# Altium PCB Плата верхняя версия 7 обычная.PcbDoc
Units mm, origin at the board's own origin, x right, y up, seen from the top; angles counter-clockwise.
Board outline 53 x 45 mm, 4 copper layers (Top Layer, Layer 1, Layer 2, Bottom Layer), stack 1.781 mm thick; 115 components, 169 nets, 808 pads, 224 vias.
Unrouted connection lines stored in the file: 286.
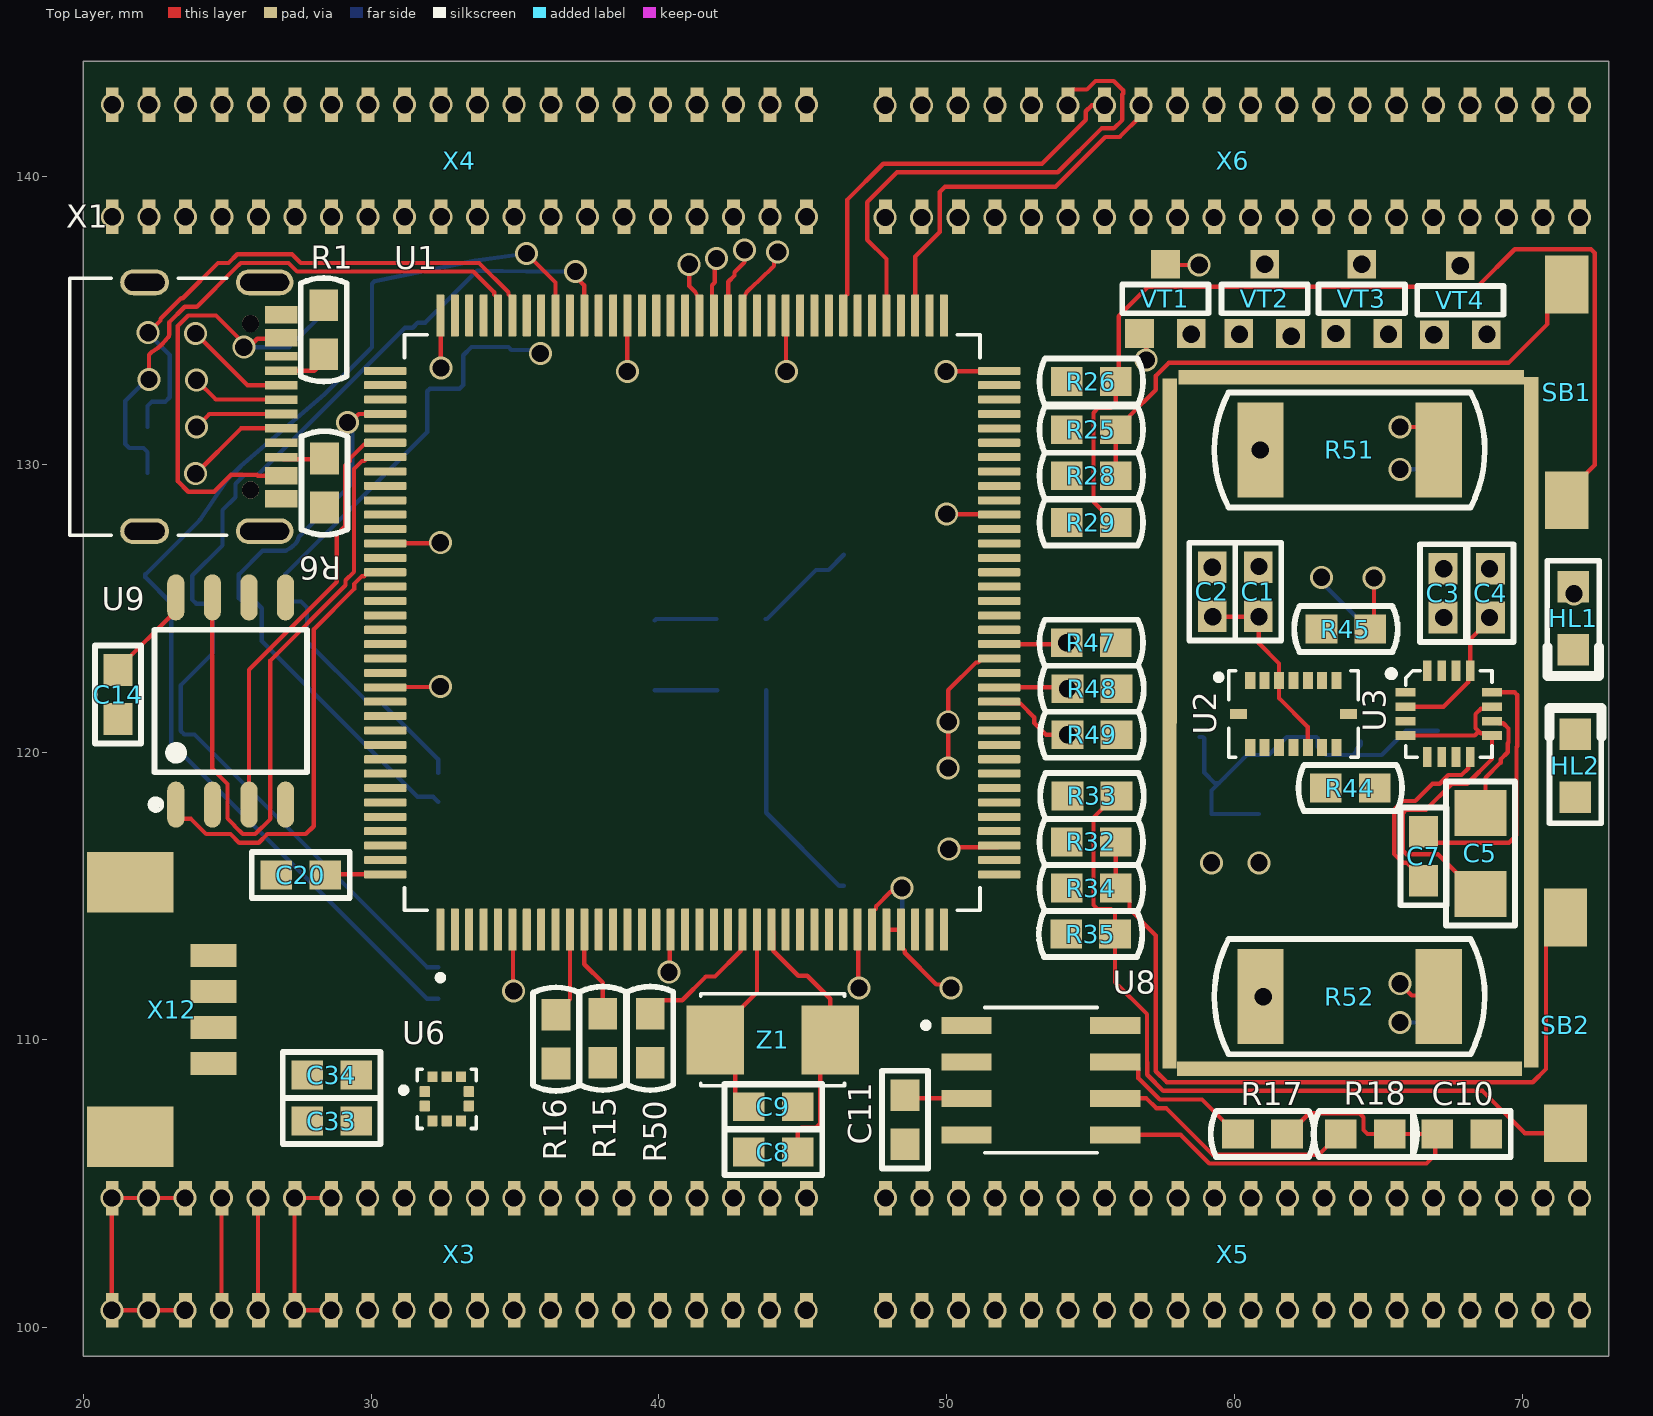
[diagram p0: Top Layer view]
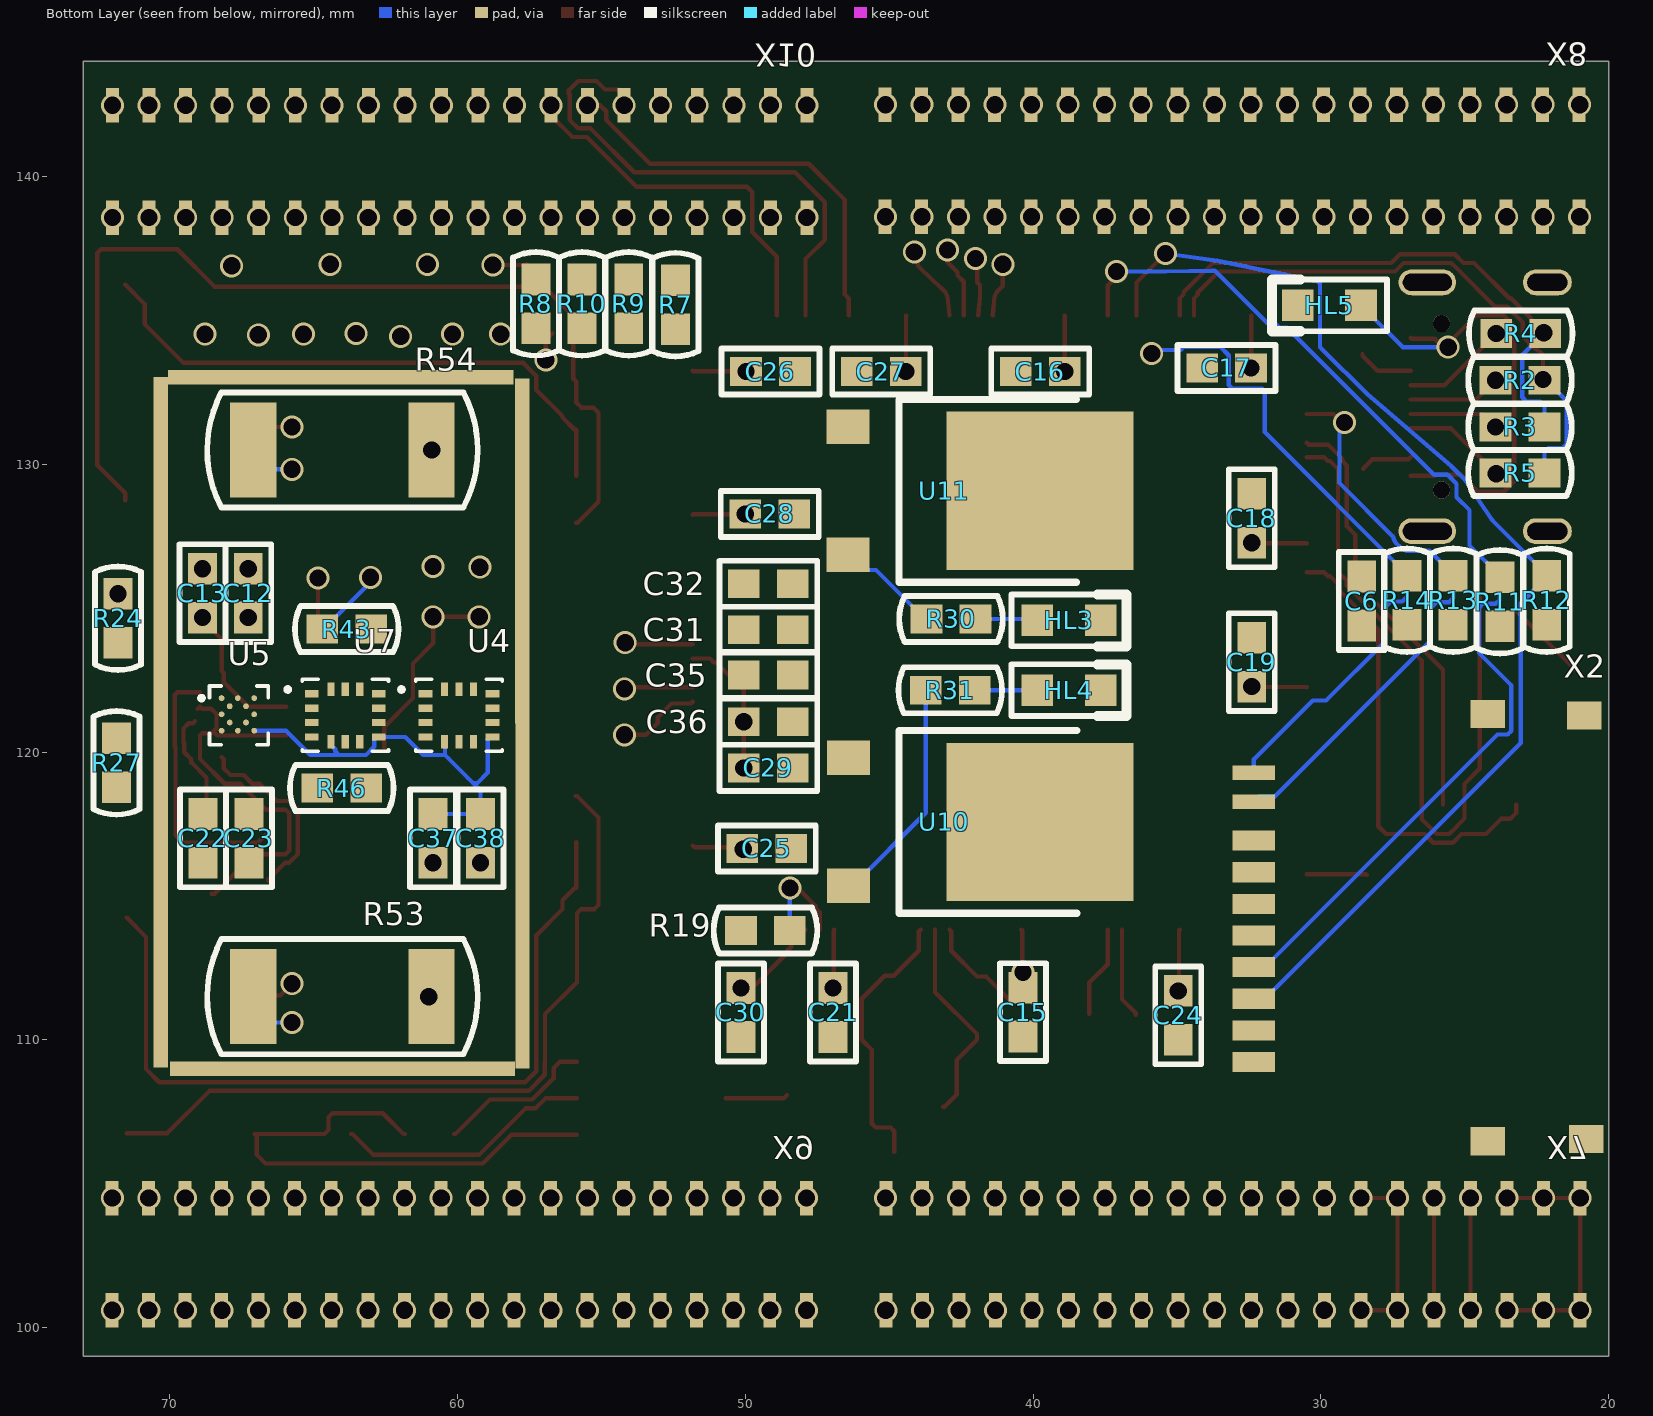
[diagram p1: Bottom Layer view, seen from below]
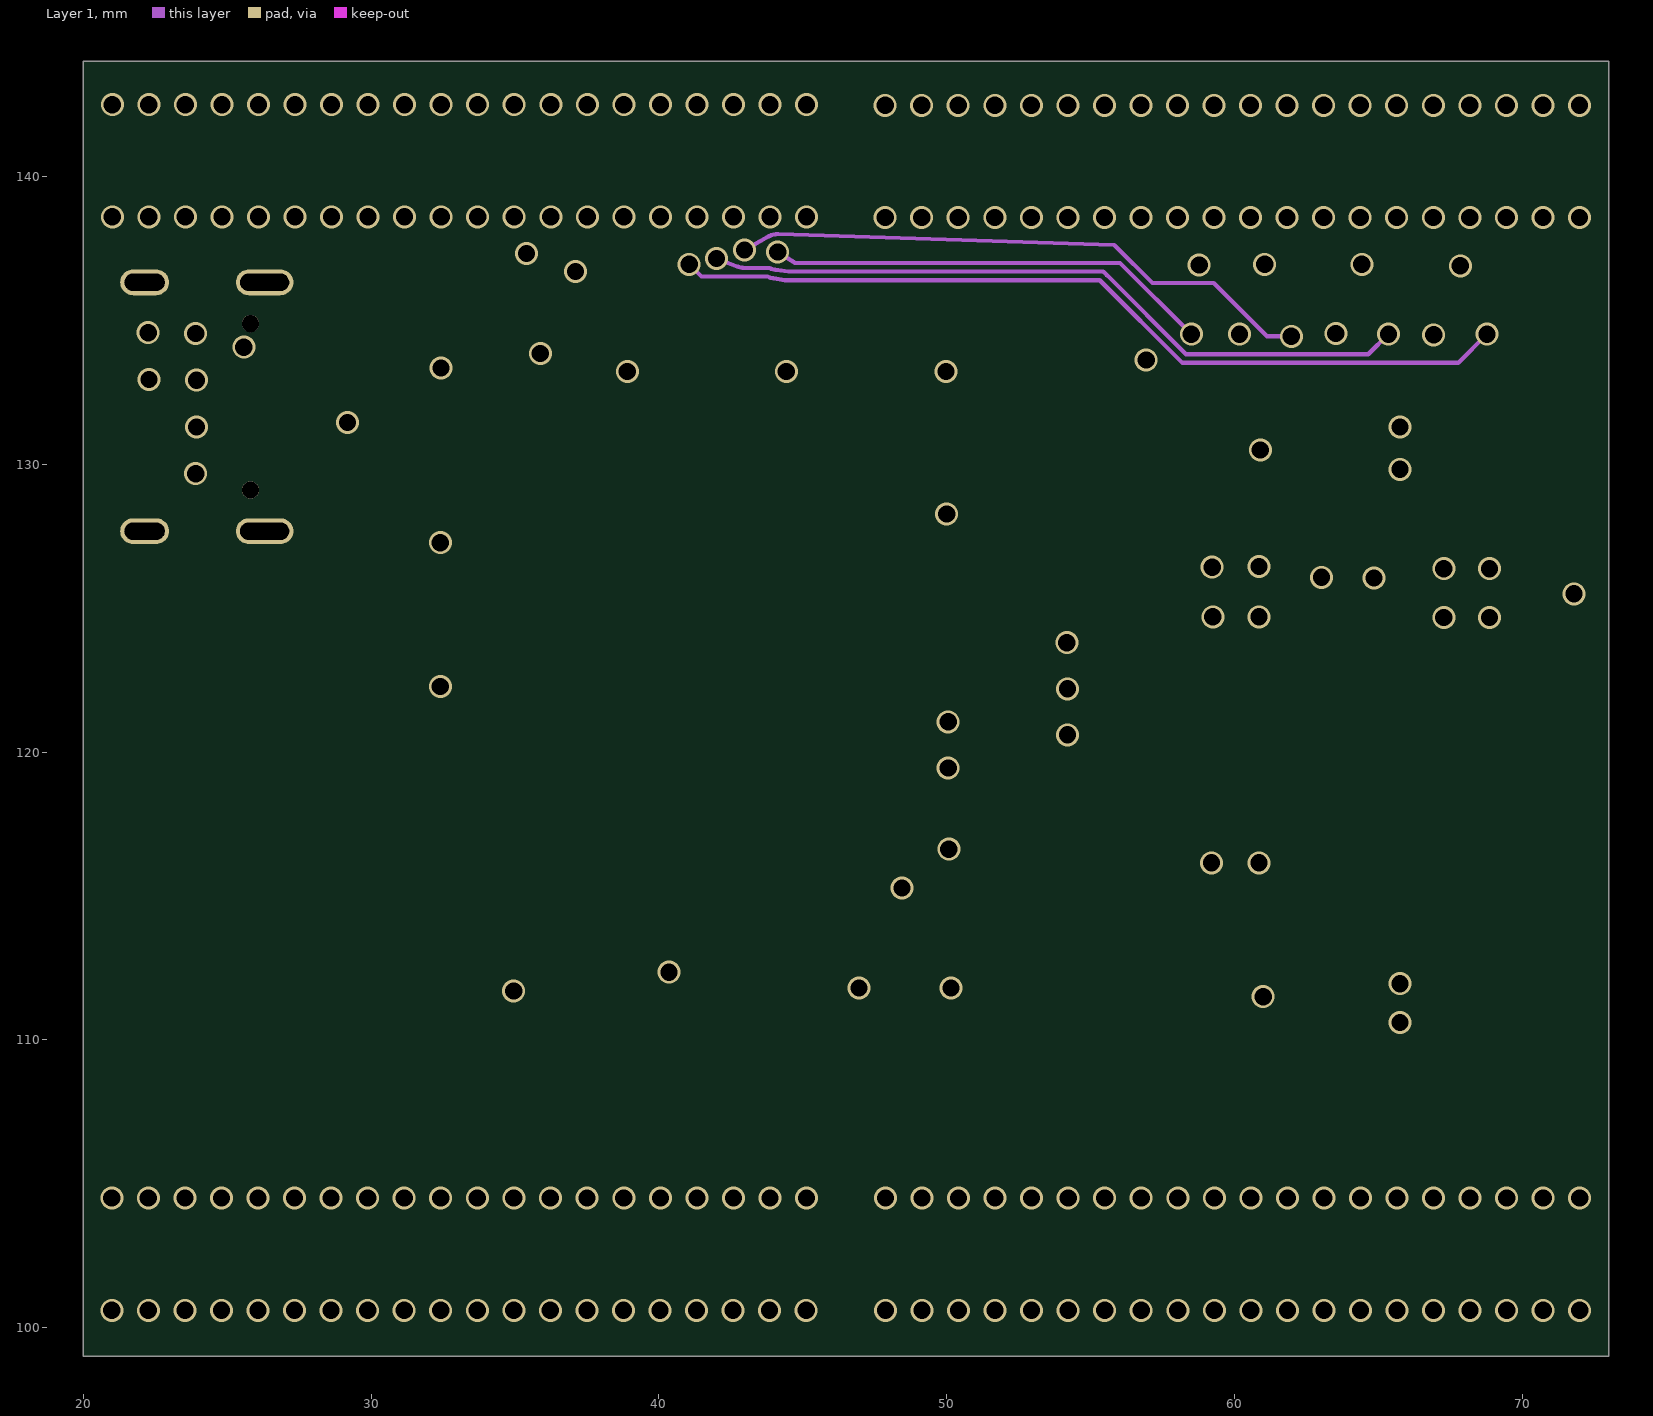
[diagram p2: Layer 1]
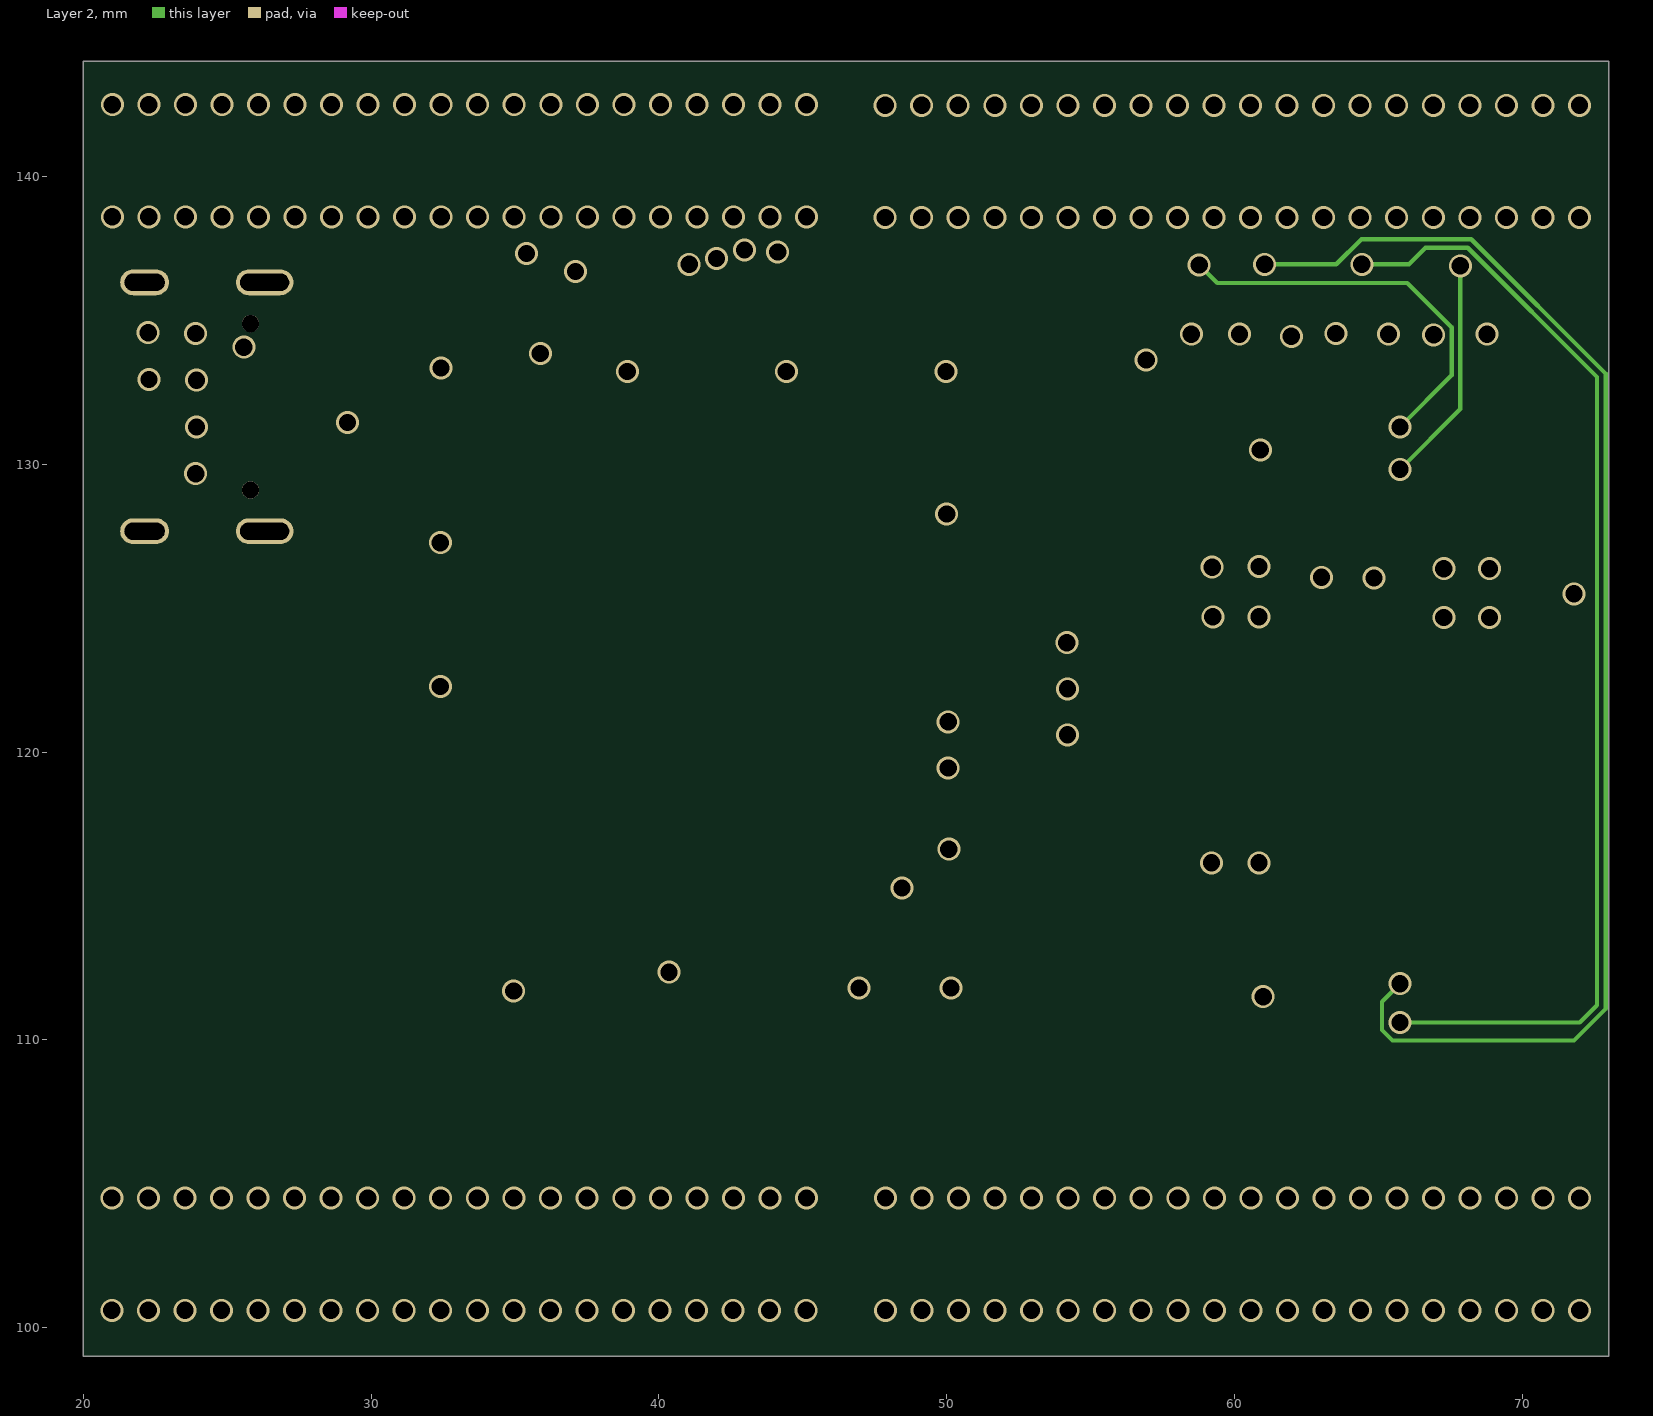
[diagram p3: Layer 2]
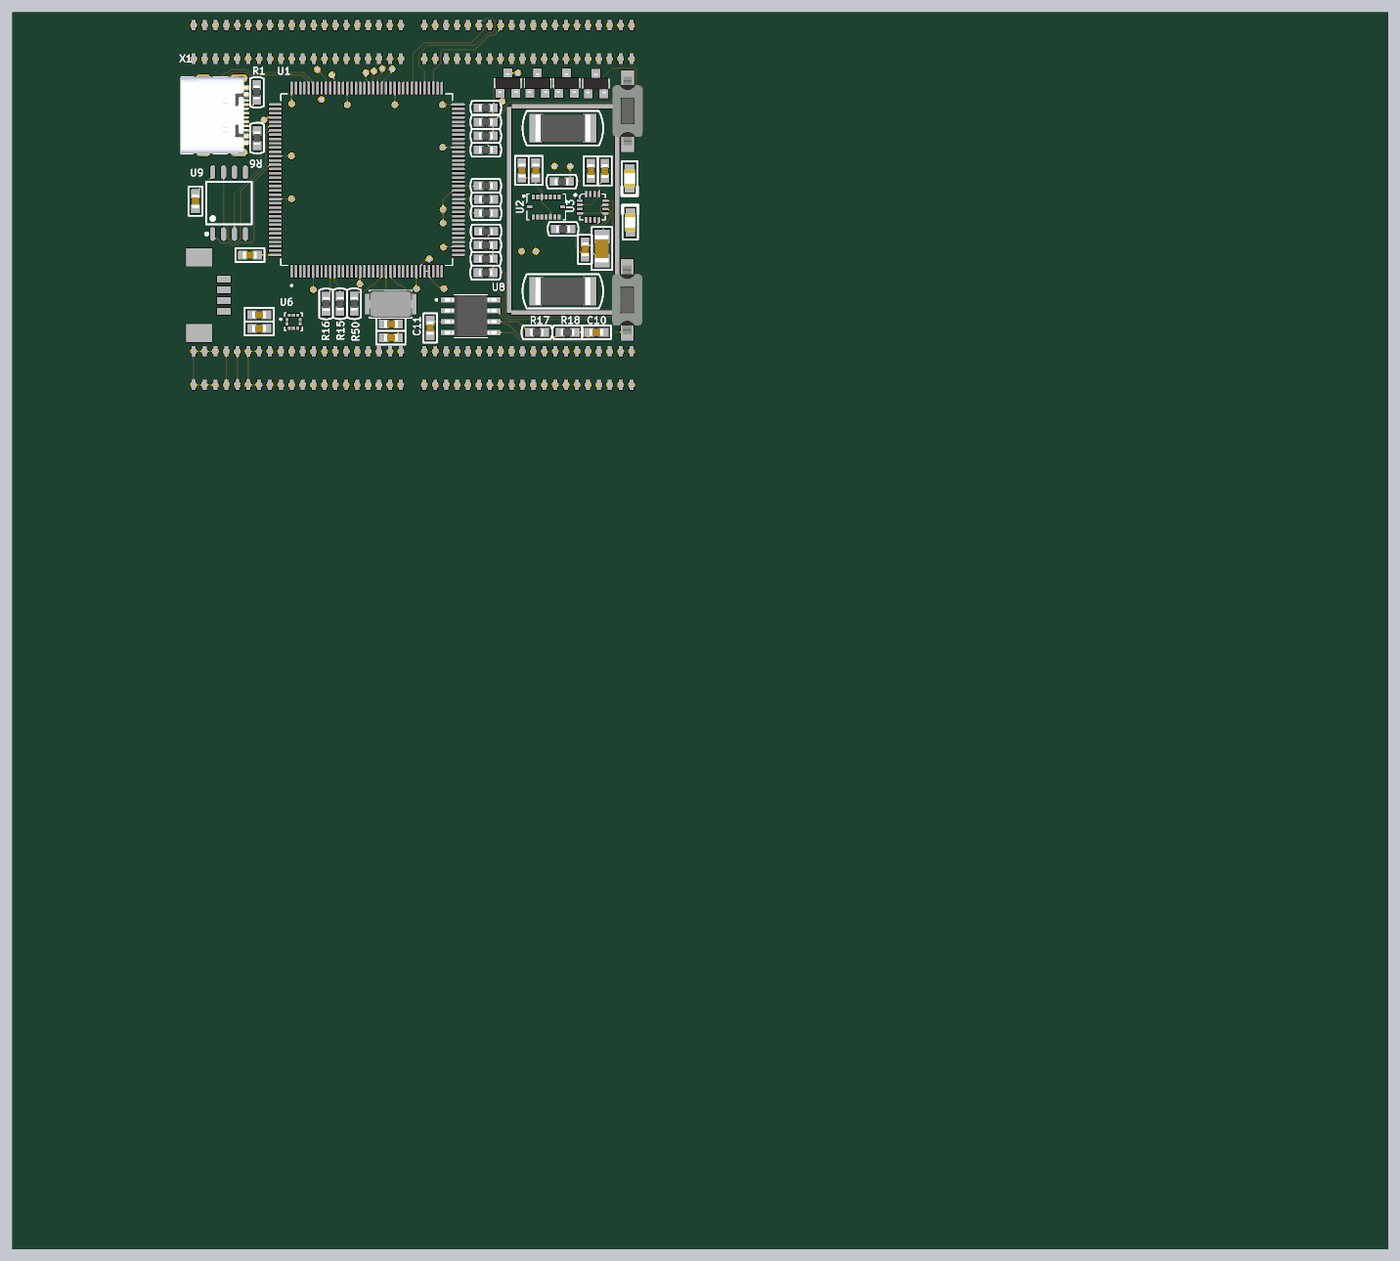
[diagram p4: 3D render of the assembled board from above, using the file's embedded part models]
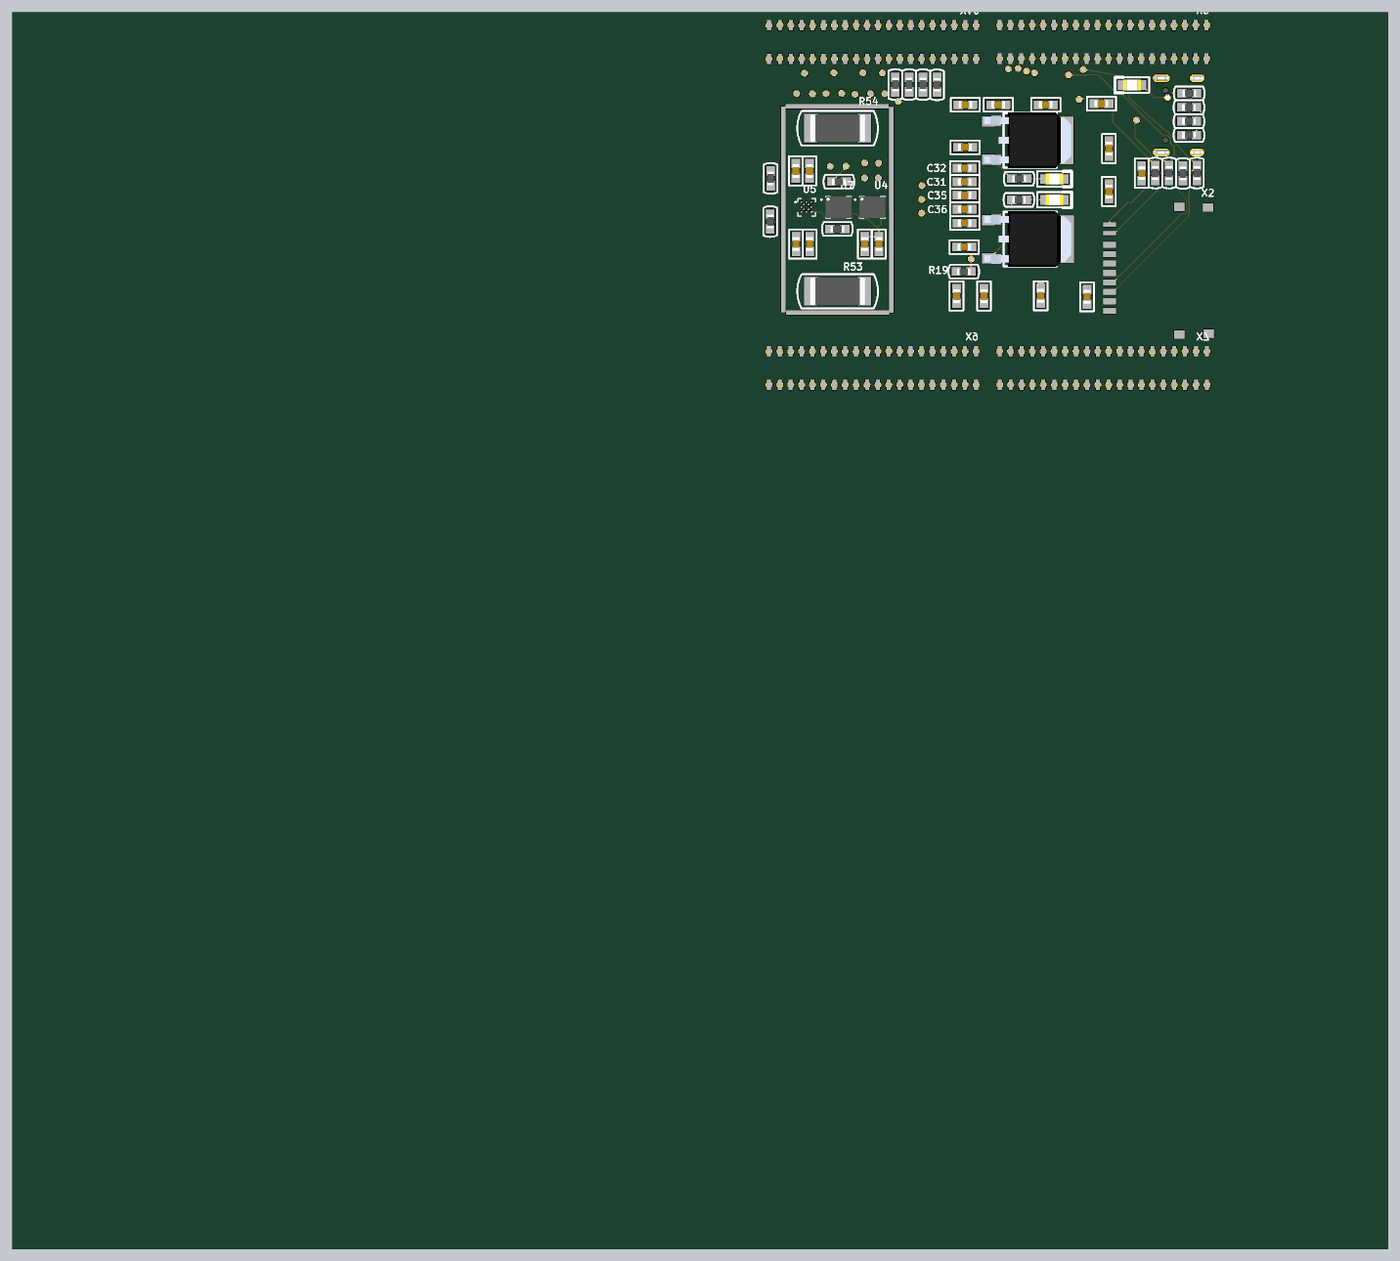
[diagram p5: 3D render of the assembled board from below, using the file's embedded part models]

## Layer stack, top to bottom
Top Solder: solder mask 0.01, Solder Resist, Dk 3.5
Top Layer: signal copper 0.035
Dielectric 2: prepreg 0.0711, PP-006, Dk 4.1
Layer 1: signal copper 0.035
Dielectric 1: core 1.499, Core-043, Dk 4.3
Layer 2: signal copper 0.035
Dielectric 3: prepreg 0.0711, PP-006, Dk 4.1
Bottom Layer: signal copper 0.035
Bottom Solder: solder mask 0.01, Solder Resist, Dk 3.5

## Board outline
20,99 20,144 73,144 73,99

## Design rules (kind name [scope] priority, off if disabled: settings)
Clearance [All] p1: gap=0.15 ignorepadtopadclearanceinfootprint=TRUE
PolygonConnect [All] p1: connectstyle=Relief reliefconductorwidth=0.254 reliefentries=4 polygonreliefangle="90 Angle" airgapwidth=0.254
RoutingVias [All] p1: holewidth=0.6 width=0.8 viastyle="Through Hole" minholewidth=0.6 minwidth=0.8 maxholewidth=0.6 maxwidth=0.8
SilkToSilkClearance [All] p1: silktosilkclearance=0
SolderMaskExpansion [All] p1: expansion=0.102 istentingtop=FALSE
Width [All] p1: maxlimit=0.15 minlimit=0.15 preferedwidth=0.15 minimp=50.000000 maximp=50.000000 favimp=50.000000
29 further rules are at their usual default settings.

## Components (designator, comment, footprint, x,y, rotation, side; value= is the part's Value field where it differs from the comment)
C1 "100nF" C0603 60.825,125.575 r90 top
C2 "100nF" C0603 59.225,125.575 r90 top
C3 "100nF" C0603 67.25,125.525 r90 top
C4 "100nF" C0603 68.9,125.525 r90 top
C5 "4u7F" C1206 68.55,116.475 r90 top
C6 "100nF" C0603 28.575,125.25 r90 bottom
C7 "200nF" C0603 66.575,116.375 r270 top
C8 "18pF" C0603 43.975,106.1 r0 top
C9 "18pF" C0603 43.975,107.675 r180 top
C10 "47nF" C0603 67.9,106.725 r180 top
C11 "100nF" C0603 48.55,107.225 r270 top
C12 "100nF" C0603 67.275,125.525 r90 bottom
C13 "100nF" C0603 68.868,125.523 r90 bottom
C14 "100nF" C0603 21.2,122 r90 top
C15 "100nF" C0603 40.35,110.964 r90 bottom
C16 "100nF" C0603 39.75,133.225 r180 bottom
C17 "100nF" C0603 33.275,133.35 r180 bottom
C18 "100nF" C0603 32.4,128.125 r270 bottom
C19 "100nf" C0603 32.4,123.125 r270 bottom
C20 "100nF" C0603 27.55,115.725 r0 top
C21 "100nF" C0603 46.95,110.95 r270 bottom
C22 "100nF" C0603 68.85,117 r270 bottom
C23 "100nF" C0603 67.25,117 r270 bottom
C24 "100nF" C0603 34.95,110.85 r270 bottom
C25 "100nF" C0603 49.25,116.65 r180 bottom
C26 "100nF" C0603 49.125,133.225 r180 bottom
C27 "100nF" C0603 45.275,133.225 r0 bottom
C28 "100nF" C0603 49.15,128.275 r180 bottom
C29 "100nF" C0603 49.2,119.45 r180 bottom
C30 "100nF" C0603 50.15,110.95 r270 bottom
C31 "1uF" C0603 49.2,124.25 r0 bottom
C32 "1uF" C0603 49.2,125.85 r0 bottom
C33 "100nF" C0603 28.625,107.175 r180 top
C34 "C1_POSTOYANNYJ" C0603 28.625,108.775 r180 top
C35 "1uF" C0603 49.2,122.675 r0 bottom
C36 "1uF" C0603 49.2,121.05 r0 bottom
C37 "C1_POSTOYANNYJ" C0603 60.85,117 r270 bottom
C38 "100nF" C0603 59.2,117 r270 bottom
HL1 "t" LD0805 71.775,124.65 r270 top
HL2 "t" LD0805 71.85,119.525 r90 top
HL3 "t" LD0805 38.75,124.575 r180 bottom
HL4 "t" LD0805 38.75,122.15 r180 bottom
HL5 "t" LD0805 29.7,135.525 r0 bottom
R1 "5K1" R0603 28.35,134.675 r90 top
R2 "100" R0603 23.075,132.925 r180 bottom
R3 "100" R0603 23.075,131.3 r180 bottom
R4 "100" R0603 23.05,134.55 r180 bottom
R5 "100" R0603 23.075,129.7 r180 bottom
R6 "5K1" R0603 28.375,129.35 r270 top
R7 "0" R0603 52.425,135.55 r90 bottom
R8 "0" R0603 57.275,135.575 r90 bottom
R9 "0" R0603 54.05,135.575 r90 bottom
R10 "0" R0603 55.675,135.575 r90 bottom
R11 "100K" R0603 23.775,125.225 r90 bottom
R12 "100K" R0603 22.15,125.275 r90 bottom
R13 "100K" R0603 25.4,125.275 r90 bottom
R14 "100K" R0603 27,125.275 r270 bottom
R15 "10K" R0603 38.05,110.05 r90 top
R16 "10K" R0603 36.425,110.025 r90 top
R17 "60" R0603 60.975,106.725 r0 top
R18 "60" R0603 64.55,106.725 r180 top
R19 "0" R0603 49.3,113.8 r180 bottom
R24 "100" R0603 71.8,124.65 r90 bottom
R25 "10K" R0603 55.025,131.2 r180 top
R26 "10K" R0603 55.025,132.875 r180 top
R27 "100" R0603 71.85,119.625 r270 bottom
R28 "0" R0603 55.025,129.6 r0 top
R29 "0" R0603 55.025,127.975 r0 top
R30 "100" R0603 42.85,124.625 r180 bottom
R31 "100" R0603 42.875,122.15 r180 bottom
R32 "10K" R0603 55.025,116.875 r180 top
R33 "10K" R0603 55.05,118.475 r180 top
R34 "0" R0603 55.025,115.275 r0 top
R35 "0" R0603 55,113.675 r0 top
R43 "10K" R0603 63.85,124.275 r180 bottom
R44 "10K" R0603 64.025,118.75 r180 top
R45 "10K" R0603 63.875,124.275 r180 top
R46 "10K" R0603 64.025,118.75 r180 bottom
R47 "NCP15XH103F03RC" R0603 55.025,123.8 r0 top
R48 "NCP15XH103F03RC" R0603 55.05,122.2 r0 top
R49 "NCP15XH103F03RC" R0603 55.05,120.6 r0 top
R50 "NCP15XH103F03RC" R0603 39.7,110.05 r270 top
R51 "0020ab 1K8 2512" R2512 64,130.5 r180 top
R52 "0020ab 1K8 2512" R2512 64,111.5 r180 top
R53 "0020ab 1K8 2512" R2512 64,111.5 r180 bottom
R54 "0020ab 1K8 2512" R2512 64,130.5 r180 bottom
SB1 "Text" DTSM-32 71.55,132.5 r0 top
SB2 "Text" DTSM-32 71.5,110.5 r0 top
U1 "K1921BK01T2" QFP50P2200X2200X160-144N 41.155,124.5 r90 top locked
U2 "BMI088" PQFN50P450X300X100-16N 62.05,121.325 r0 top
U3 "QMC5883L" PLCC16-0.5-3X3MM 65.95,119.825 r0 top
U4 "QMI8658" XDCR_BMI270 59.95,121.275 r180 bottom
U5 "BMM150" XDCR_BMM150 67.6,121.275 r180 bottom
U6 "BMP388" PQFN50P200X200X80-10N 32.625,107.95 r0 top
U7 "BMI270" XDCR_BMI270 63.9,121.275 r180 bottom
U8 "TJA1040T" SOIC127P600X175-8N 53.275,108.6 r0 top
U9 "W25Q128FVSIG" SOIC127P790X216-8N 25.115,121.775 r90 top
U10 "КФ1158Н" SOT-428 41.655,117.573 r270 bottom
U11 "КФ1158Н" SOT-428 41.662,129.077 r270 bottom
VT1 "КТ234В9" SOT-23 57.6,135.75 r0 top
VT2 "КТ234В9" SOT-23 61.05,135.75 r0 top
VT3 "MOSFET-N" SOT-23 64.425,135.75 r0 top
VT4 "КТ234В9" SOT-23 67.85,135.7 r0 top
X1 "TYPE-C-31-M-12" HRO_TYPE-C-31-M-12 22.125,132 r270 top
X2 "microSD" SD 28,114.275 r270 bottom
X3 "Header 2x20" PBD1.27-40SA 33.994,102.547 r90 top
X4 "Header 2x20" PBD1.27-40SA 33.994,140.547 r90 top
X5 "Header 2x20" PBD1.27-40SA 60.864,102.547 r90 top
X6 "Header 2x20" PBD1.27-40SA 60.864,140.547 r90 top
X7 "Header 2x20" "Headr 2x20 female" 31.947,102.42 r90 bottom
X8 "Header 2x20" "Headr 2x20 female" 31.982,140.42 r90 bottom
X9 "Header 2x20" "Headr 2x20 female" 58.842,102.42 r90 bottom
X10 "Header 2x20" "Headr 2x20 female" 58.822,140.395 r90 bottom
X12 "Header 1x4" "PicoBlade 4pin" 23,111.085 r270 top
Z1 "KSE-7I08000MAF343ZA3" XTAL_NX5032GA-8.000M-STD-CSU-1 43.95,110 r0 top

## Footprints (in the part's own frame and the unit in brackets; to place one, negate y for a bottom-side part, rotate by r counter-clockwise, add the part's x,y. Pads: shape width x height; smd on the part's side, far side on the other; paste and mask are expansions set on the pad)
C0603 [mm] "1608M"
  rect 1.1x1 smd: 1(-0.85,0) 2(0.85,0)
  silkscreen extent -1.7,-0.8 1.7,0.8, body extent -0.8,-0.4 0.8,0.4, height 0.91
C1206 [mm] "3216M"
  rect 1.6x1.8 smd: 1(-1.4,0) 2(1.4,0)
  silkscreen extent -2.5,-1.2 2.5,1.2, body extent -1.6,-0.8 1.6,0.8, height 1.01
DTSM-32 [mm] "1 contact, Surface, 0.05A, 250V, H=5mm"
  rect 1.5x2 smd: 1(0,3.75) 2(0,-3.75)
  body extent -1.75,-4 1.75,4, height 5.5
"Headr 2x20 female" [mm]
  rect 1.2x0.45 smd: 1(-1.82,-10.962) 2(2.08,-10.962) 3(-1.82,-9.692) 4(2.08,-9.692) 5(-1.82,-8.422) 6(2.08,-8.422) 7(-1.82,-7.152) 8(2.08,-7.152) 9(-1.82,-5.882) 10(2.08,-5.882) 11(-1.82,-4.612) 12(2.08,-4.612) 13(-1.82,-3.342) 14(2.08,-3.342) 15(-1.82,-2.072) 16(2.08,-2.072) 17(-1.82,-0.802) 18(2.08,-0.802) 19(-1.82,0.468) 20(2.08,0.468) 21(-1.82,1.738) 22(2.08,1.738) 23(-1.82,3.008) 24(2.08,3.008) 25(-1.82,4.278) 26(2.08,4.278) 27(-1.82,5.548) 28(2.08,5.548) 29(-1.82,6.818) 30(2.08,6.818) 31(-1.82,8.088) 32(2.08,8.088) 33(-1.82,9.358) 34(2.08,9.358) 35(-1.82,10.628) 36(2.08,10.628) 37(-1.82,11.898) 38(2.08,11.898) 39(-1.82,13.168) 40(2.08,13.168)
HRO_TYPE-C-31-M-12 [mm]
  rect 0.6x1.14 smd mask+0.05: A1_B12(-3.2,4.75) A4_B9(-2.4,4.75) B1_A12(3.2,4.75) B4_A9(2.4,4.75)
  rect 0.3x1.14 smd mask+0.05: A5(-1.25,4.75) A6(-0.25,4.75) A7(0.25,4.75) A8(1.25,4.75) B5(1.75,4.75) B6(0.75,4.75) B7(-0.75,4.75) B8(-1.75,4.75)
  oval 0.9x2 hole 0.6 slot 1.7 at 90 deg: S1(-4.325,4.17) S2(4.325,4.17)
  oval 0.9x1.7 hole 0.6 slot 1.4 at 90 deg: S3(-4.325,0) S4(4.325,0)
  round 0.6 hole 0.6 unplated: ""(-2.89,3.68) ""(2.89,3.68)
  silkscreen extent -4.47,-2.6 4.47,2.85, body extent -4.47,-2.6 4.47,5.31, height 3.31
LD0805 [mm]
  rect 1.1x1.1 smd: 1(-1.1,0) 2(1.1,0)
  silkscreen extent -2,-0.9 2,0.9, body extent -1,-0.62 1,0.63, height 0.73
PBD1.27-40SA [mm]
  rect 1.2x0.45 smd: 1(-1.947,12.994) 2(1.953,12.994) 3(-1.947,11.724) 4(1.953,11.724) 5(-1.947,10.454) 6(1.953,10.454) 7(-1.947,9.184) 8(1.953,9.184) 9(-1.947,7.914) 10(1.953,7.914) 11(-1.947,6.644) 12(1.953,6.644) 13(-1.947,5.374) 14(1.953,5.374) 15(-1.947,4.104) 16(1.953,4.104) 17(-1.947,2.834) 18(1.953,2.834) 19(-1.947,1.564) 20(1.953,1.564) 21(-1.947,0.294) 22(1.953,0.294) 23(-1.947,-0.976) 24(1.953,-0.976) 25(-1.947,-2.246) 26(1.953,-2.246) 27(-1.947,-3.516) 28(1.953,-3.516) 29(-1.947,-4.786) 30(1.953,-4.786) 31(-1.947,-6.056) 32(1.953,-6.056) 33(-1.947,-7.326) 34(1.953,-7.326) 35(-1.947,-8.596) 36(1.953,-8.596) 37(-1.947,-9.866) 38(1.953,-9.866) 39(-1.947,-11.136) 40(1.953,-11.136)
"PicoBlade 4pin" [mm]
  rect 0.8x1.6 smd: 1(-1.84,1.525) 2(-0.59,1.525) 3(0.66,1.525) 4(1.91,1.525)
  rect 2.1x3 smd: S(-4.39,-1.375) S(4.46,-1.375)
PLCC16-0.5-3X3MM [mm]
  rect 0.7x0.3 smd: 1(0,2.25) 2(0,1.75) 3(0,1.25) 4(0,0.75) 9(3,0.75) 10(3,1.25) 11(3,1.75) 12(3,2.25)
  rect 0.3x0.7 smd: 5(0.75,0) 6(1.25,0) 7(1.75,0) 8(2.25,0) 13(2.25,3) 14(1.75,3) 15(1.25,3) 16(0.75,3)
  silkscreen extent -0.6,0 3,3
PQFN50P200X200X80-10N [mm]
  rrect9% 0.35x0.38 smd: 1(-0.765,0.25) 2(-0.765,-0.25) 3(-0.5,-0.765) 4(0,-0.765) 5(0.5,-0.765) 6(0.765,-0.25) 7(0.765,0.25) 8(0.5,0.765) 9(0,0.765) 10(-0.5,0.765)
  silkscreen extent -1.6,-1.03 1.03,1.03
PQFN50P450X300X100-16N [mm]
  rect 0.35x0.59 smd: 1(-1.5,1.165) 2(-1,1.165) 3(-0.5,1.165) 4(0,1.165) 5(0.5,1.165) 6(1,1.165) 7(1.5,1.165) 9(1.5,-1.165) 10(1,-1.165) 11(0.5,-1.165) 12(0,-1.165) 13(-0.5,-1.165) 14(-1,-1.165) 15(-1.5,-1.165)
  rect 0.59x0.35 smd: 8(1.915,0) 16(-1.915,0)
  silkscreen extent -2.7,-1.5 2.25,1.5
QFP50P2200X2200X160-144N [mm]
  rrect25% 1.47x0.28 smd: 1(-10.67,8.75) 2(-10.67,8.25) 3(-10.67,7.75) 4(-10.67,7.25) 5(-10.67,6.75) 6(-10.67,6.25) 7(-10.67,5.75) 8(-10.67,5.25) 9(-10.67,4.75) 10(-10.67,4.25) 11(-10.67,3.75) 12(-10.67,3.25) 13(-10.67,2.75) 14(-10.67,2.25) 15(-10.67,1.75) 16(-10.67,1.25) 17(-10.67,0.75) 18(-10.67,0.25) 19(-10.67,-0.25) 20(-10.67,-0.75) 21(-10.67,-1.25) 22(-10.67,-1.75) 23(-10.67,-2.25) 24(-10.67,-2.75) 25(-10.67,-3.25) 26(-10.67,-3.75) 27(-10.67,-4.25) 28(-10.67,-4.75) 29(-10.67,-5.25) 30(-10.67,-5.75) 31(-10.67,-6.25) 32(-10.67,-6.75) 33(-10.67,-7.25) 34(-10.67,-7.75) 35(-10.67,-8.25) 36(-10.67,-8.75) 73(10.67,-8.75) 74(10.67,-8.25) 75(10.67,-7.75) 76(10.67,-7.25) 77(10.67,-6.75) 78(10.67,-6.25) 79(10.67,-5.75) 80(10.67,-5.25) 81(10.67,-4.75) 82(10.67,-4.25) 83(10.67,-3.75) 84(10.67,-3.25) 85(10.67,-2.75) 86(10.67,-2.25) 87(10.67,-1.75) 88(10.67,-1.25) 89(10.67,-0.75) 90(10.67,-0.25) 91(10.67,0.25) 92(10.67,0.75) 93(10.67,1.25) 94(10.67,1.75) 95(10.67,2.25) 96(10.67,2.75) 97(10.67,3.25) 98(10.67,3.75) 99(10.67,4.25) 100(10.67,4.75) 101(10.67,5.25) 102(10.67,5.75) 103(10.67,6.25) 104(10.67,6.75) 105(10.67,7.25) 106(10.67,7.75) 107(10.67,8.25) 108(10.67,8.75)
  rrect25% 0.28x1.47 smd: 37(-8.75,-10.67) 38(-8.25,-10.67) 39(-7.75,-10.67) 40(-7.25,-10.67) 41(-6.75,-10.67) 42(-6.25,-10.67) 43(-5.75,-10.67) 44(-5.25,-10.67) 45(-4.75,-10.67) 46(-4.25,-10.67) 47(-3.75,-10.67) 48(-3.25,-10.67) 49(-2.75,-10.67) 50(-2.25,-10.67) 51(-1.75,-10.67) 52(-1.25,-10.67) 53(-0.75,-10.67) 54(-0.25,-10.67) 55(0.25,-10.67) 56(0.75,-10.67) 57(1.25,-10.67) 58(1.75,-10.67) 59(2.25,-10.67) 60(2.75,-10.67) 61(3.25,-10.67) 62(3.75,-10.67) 63(4.25,-10.67) 64(4.75,-10.67) 65(5.25,-10.67) 66(5.75,-10.67) 67(6.25,-10.67) 68(6.75,-10.67) 69(7.25,-10.67) 70(7.75,-10.67) 71(8.25,-10.67) 72(8.75,-10.67) 109(8.75,10.67) 110(8.25,10.67) 111(7.75,10.67) 112(7.25,10.67) 113(6.75,10.67) 114(6.25,10.67) 115(5.75,10.67) 116(5.25,10.67) 117(4.75,10.67) 118(4.25,10.67) 119(3.75,10.67) 120(3.25,10.67) 121(2.75,10.67) 122(2.25,10.67) 123(1.75,10.67) 124(1.25,10.67) 125(0.75,10.67) 126(0.25,10.67) 127(-0.25,10.67) 128(-0.75,10.67) 129(-1.25,10.67) 130(-1.75,10.67) 131(-2.25,10.67) 132(-2.75,10.67) 133(-3.25,10.67) 134(-3.75,10.67) 135(-4.25,10.67) 136(-4.75,10.67) 137(-5.25,10.67) 138(-5.75,10.67) 139(-6.25,10.67) 140(-6.75,10.67) 141(-7.25,10.67) 142(-7.75,10.67) 143(-8.25,10.67) 144(-8.75,10.67)
  silkscreen extent -12.44,-10 10,10
R0603 [mm] "1608M"
  rect 1.1x1 smd: 1(-0.85,0) 2(0.85,0)
  silkscreen extent -1.8,-0.8 1.8,0.8, body extent -0.8,-0.4 0.8,0.4, height 0.38
R2512 [mm] "6432M"
  rect 1.6x3.3 smd: 1(-3.1,0) 2(3.1,0)
  silkscreen extent -4.7,-2 4.7,2, body extent -3.2,-1.6 3.2,1.6, height 0.7
SD [mm]
  rect 0.5x1.47 smd: 1(-5,-4.325) 2(-4,-4.325)
  rect 0.7x1.47 smd: 3(-2.65,-4.325) 4(-1.55,-4.325) 5(-0.45,-4.325) 6(0.65,-4.325) 7(1.75,-4.325) 8(2.85,-4.325) 9(3.95,-4.325) CD(5.05,-4.325)
  rect 0.98x1.2 smd: S1(-7.05,3.8) S2(7.8,3.8) S3(7.725,7.225) S4(-7,7.15)
SOIC127P600X175-8N [mm]
  rect 1.75x0.59 smd: 1(-2.585,1.905) 2(-2.585,0.635) 3(-2.585,-0.635) 4(-2.585,-1.905) 5(2.585,-1.905) 6(2.585,-0.635) 7(2.585,0.635) 8(2.585,1.905)
  silkscreen extent -4.1,-2.52 1.95,2.52, body extent -3,-2.45 3,2.45, height 1.75
SOIC127P790X216-8N [mm]
  oval 1.6x0.6 smd: 1(-3.6,1.905) 2(-3.6,0.635) 3(-3.6,-0.635) 4(-3.6,-1.905) 5(3.6,-1.905) 6(3.6,-0.635) 7(3.6,0.635) 8(3.6,1.905)
  silkscreen extent -3.82,-2.65 2.47,2.82
SOT-23 [mm] "КТ-46"
  rect 1x1 smd: 1(-0.9,-1.2) 2(0,1.2) 3(0.9,-1.2)
  silkscreen extent -1.5,-0.5 1.5,0.5, body extent -1.5,-1.15 1.5,1.15, height 1.11
SOT-428 [mm] "КТ-89, DPAK, TO-252"
  rect 1.2x1.5 smd: 1(-2.222,-4.763) 3(2.223,-4.763)
  rect 5.5x6.5 smd: 2(0,1.905)
  silkscreen extent -3.17,-3 3.18,3.17, body extent -3.25,-5.28 3.25,4.86, height 2.43
XDCR_BMI270 [mm]
  rect 0.475x0.25 smd: 1(-1.162,0.75) 2(-1.162,0.25) 3(-1.162,-0.25) 4(-1.162,-0.75) 8(1.162,-0.75) 9(1.162,-0.25) 10(1.162,0.25) 11(1.162,0.75)
  rect 0.25x0.475 smd: 5(-0.5,-0.912) 6(0,-0.912) 7(0.5,-0.912) 12(0.5,0.913) 13(0,0.913) 14(-0.5,0.913)
  silkscreen extent -2.08,-1.25 1.5,1.25, body extent -1.5,-1.25 1.5,1.25, height 0.87
XDCR_BMM150 [mm]
  round 0.2 smd: A1(-0.601,0.601) A3(-0.035,0.601) A5(0.531,0.601) B2(-0.318,0.318) B4(0.248,0.318) C1(-0.601,0.035) C5(0.531,0.035) D2(-0.318,-0.248) D4(0.248,-0.248) E1(-0.601,-0.531) E3(-0.035,-0.531) E5(0.531,-0.531)
  silkscreen extent -1.38,-1.02 1.02,1.02
XTAL_NX5032GA-8.000M-STD-CSU-1 [mm]
  rect 2x2.4 smd: 1(-2,0) 2(2,0)
  silkscreen extent -2.5,-1.6 2.5,1.6, body extent -2.5,-1.6 2.5,1.6, height 1.5

## Part data
C1 C2 C3 C4 C5 C6 C7 C8 C9 C10 C11 C12 C13 C14 C15 C16 C17 C18 C19 C20 C21 C22 C23 C24 C25 C26 C27 C28 C29 C30 C31 C32 C33 C35 C36 C38: library part C1_POSTOYANNYJ, "Конденсатор постоянной емкости"
C34 C37: "Конденсатор постоянной емкости"
HL1 HL2 HL3 HL4 HL5: library part Led-1, Published=03.12.2013, Publisher="Andrew Danich", Type="Индикатор единичный"
R1 R2 R3 R4 R5 R6 R7 R8 R9 R10 R11 R12 R13 R14 R15 R16 R17 R18 R19 R24 R25 R26 R27 R28 R29 R30 R31 R32 R33 R34 R35: library part R1_POSTOYANNYJ, "Резистор постоянный", Simulation ModelName=Resistors, Simulation PortMap=(1:1),(2:2)
R43 R44 R45 R46: library part Resistor, Published=24.03.2010, Publisher="Andrew Danich", Type=Резистор
R47 R48 R49 R50 R51 R52 R53 R54: library part Resistor_0,25W, Published=19.09.2014, Publisher="Andrew Danich", Type=Резистор
SB1 SB2: library part BT-01x-01p-LED, Published=17.04.2014, Publisher="Andrew Danich", Type=Переключатель
U1: "MCU"
U2 U4: "IMU"
U3 U5: "Compass"
U6: "Barometer"
U7: library part QMI8658, "IMU"
U8: "CAN-Transciever"
U9: "Memory 4MB"
U10 U11: "LDO"
VT1 VT2 VT4: library part MOSFET-N, Published=24.09.2010, Publisher="Andrew Danich", Type=Транзистор
X2: library part MICROSD, "Описание свойств компонента"
Z1: library part KX-38T
VT3: Published=24.09.2010, Publisher="Andrew Danich", Type=Транзистор

## Free pads (board coordinates)
  rect 0.5x12 smd: 17(57.743,115.002) 17(57.745,126.986) 17(70.316,115.045) 17(70.318,127.03)
  rect 0.5x12 smd far side: 17(57.743,115.002) 17(57.745,126.986) 17(70.316,115.045) 17(70.318,127.03)
  rect 12x0.5 smd: 17(64,109) 17(64.061,133.031)
  rect 12x0.5 smd far side: 17(64,109) 17(64.061,133.031)

## Via types
v1: diameter 0.8, hole 0.6, Top Layer to Bottom Layer, 224 vias

## Nets (pads, with @x,y where several pads share a name; then routed paths per layer and width w, separated by ;. In a path a pad name is that pad's centre, name@x,y a point inside that pad or via, vN(x,y) a via of type N, cw(c..) or ccw(c..) an arc to the next point about the centre after c; other vN are vias at no path point)
3V3: C6.1 C14.2 C15.2 C16.2 C17.2 C18.2 C19.2 C20.2 C21.1 C24.1 C25.1 C26.1 C27.1 C28.1 C29.1 C30.1 C36.2 R11.1 R12.1 R13.1 R14.2 R25.2 R26.2 R30.1 R32.2 R33.2 R43.2 R44.2 R45.2 R46.2 U1.6 U1.17 U1.30 U1.32 U1.33 U1.39 U1.52 U1.62 U1.72 U1.84 U1.95 U1.108 U1.121 U1.131 U1.144 U9.8 U11.3 X2.4 X3.9 X3.10 X6.31 X6.32 X7.9 X7.10 X10.31 X10.32 X12.1 | length 42.2
  Top Layer w0.15: C14.2 21.2,122.9 23.21,124.91 U9.8 ; v1(26.065,100.6) v1(26.065,104.5) ; C20.2 28.425,115.75 U1.144 ; U1.131 30.498,122.262 32.388,122.262 v1(32.4,122.275) ; U1.121 30.498,127.262 32.387,127.262 v1(32.4,127.275) ; U1.108 32.415,135.16 32.415,133.36 v1(32.425,133.35) ; U1.6 34.928,113.807 34.928,111.722 v1(34.95,111.7) ; v1(38.9,133.225) 38.903,133.228 38.903,135.168 U1.95 ; v1(40.35,112.35) 40.378,112.378 40.378,113.802 U1.17 ; U1.84 44.415,135.16 44.415,133.235 v1(44.425,133.225) ; U1.30 46.927,113.807 46.927,111.823 v1(46.95,111.8) ; U1.32 U1.33 48.405,113.235 48.54,113.1 48.54,113.022 49.638,111.924 50.026,111.924 v1(50.15,111.8) ; v1(49.975,133.225) 49.987,133.238 51.813,133.238 U1.72 ; v1(50,128.275) 50.012,128.263 51.813,128.263 U1.62 ; v1(50.05,119.45) v1(50.05,121.05) 50.05,122.148 51.017,123.115 51.095,123.115 51.23,123.25 U1.52 ; v1(50.075,116.625) 50.138,116.688 51.763,116.688 U1.39
  Bottom Layer w0.15: R30.1 43.75,124.625 45.455,126.33 45.9,126.33 U11.3
  other v1: 66.91,138.575 66.91,142.475
3V3_SENSOR: C1.1 C2.1 C3.1 C4.1 C12.1 C13.1 C22.1 C23.1 C32.2 C33.1 C34.1 C37.1 C38.1 R15.1 R16.1 R31.1 U2.3 U2.11 U3.2 U3.13 U4.5 U4.8 U5.B2 U5.E5 U6.1 U6.10 U7.5 U7.8 U10.3 | length 34.9
  Top Layer w0.15: v1(59.25,124.7) v1(60.85,124.7) 60.85,123.78 61.55,123.08 U2.3 61.55,121.875 62.55,120.875 U2.11 ; U3.2 67.268,121.575 68.125,122.432 68.125,122.75 U3.13 68.2,123.925 68.868,124.593 v1(68.868,124.673)
  Bottom Layer w0.15: R31.1 43.725,117.893 46.268,115.35 U10.3 ; U4.8 58.9,120.525 58.95,120.475 58.95,119.291 59.329,118.912 59.45,118.912 ; 59.669,119.131 59.45,118.912 ; 59.67,119.13 60.3,119.759 60.3,119.763 60.438,119.9 ; U4.5 60.438,120.35 60.438,119.9 ; C37.1 C38.1 59.2,118.663 59.45,118.912 ; U7.5 64.4,120.25 64.25,120.1 64.25,120.032 64.118,119.9 ; U5.E5 65.962,120.744 65.118,119.9 64.118,119.9 ; 60.438,119.9 61.195,119.9 61.82,120.525 U7.8 62.85,120.525 62.9,120.475 62.9,120.182 63.182,119.9 64.118,119.9
  other v1: 67.275,124.675
4V2: X3.11 X3.12 X3.13 X3.14 X6.27 X6.28 X6.29 X6.30 X7.11 X7.12 X7.13 X7.14 X10.27 X10.28 X10.29 X10.30 | length 6.4
  Top Layer w0.15: v1(28.605,100.6) X3.11 v1(27.335,100.6) v1(27.335,104.5) X3.12 v1(28.605,104.5)
  other v1: 64.37,138.575 65.64,138.575 64.37,142.475 65.64,142.475
5V: C11.1 C31.2 C35.2 HL5.2 U8.3 U10.1 U11.1 X3.7 X3.8 X6.33 X6.34 X7.7 X7.8 X10.33 X10.34 | length 6.1
  Top Layer w0.15: v1(24.795,100.6) v1(24.795,104.5) ; C11.1 48.66,107.965 U8.3
  other v1: 68.18,138.575 68.18,142.475
GND: C1.2 C2.2 C3.2 C4.2 C5.1 C6.2 C8.1 C9.1 C10.1 C11.2 C12.2 C13.2 C14.1 C15.1 C16.1 C17.1 C18.1 C19.1 C20.1 C21.2 C22.2 C23.2 C24.2 C25.2 C26.2 C27.2 C28.2 C29.2 C30.2 C31.1 C32.1 C33.2 C34.2 C35.1 C36.1 C37.2 C38.2 HL1.2 HL2.2 HL3.2 HL4.2 R1.2 R6.2 R19.1 R28.1 R29.1 R34.1 R35.1 R47.2 R48.2 R49.2 R50.2 R51.2 R52.2 R53.2 R54.2 U1.16 U1.38 U1.51 U1.61 U1.83 U1.94 U1.107 U1.120 U1.130 U2.2 U2.4 U2.6 U2.7 U3.4 U3.9 U3.11 U4.6 U4.7 U5.A1 U5.C5 U5.E1 U5.E3 U6.3 U6.8 U6.9 U7.6 U7.7 U8.2 U8.8 U9.4 U10.2 U11.2 X1.A1_B12 X1.B1_A12 X2.6 X2.S1 X2.S2 X3.37 X3.38 X3.39 X3.40 X4.1 X4.2 X4.3 X4.4 X4.5 X4.6 X4.37 X4.38 X4.39 X4.40 X5.1 X5.2 X5.3 X5.4 X5.35 X5.36 X5.37 X5.38 X5.39 X5.40 X6.1 X6.2 X6.3 X6.4 X7.37 X7.38 X7.39 X7.40 X8.1 X8.2 X8.3 X8.4 X8.5 X8.6 X8.37 X8.38 X8.39 X8.40 X9.1 X9.2 X9.3 X9.4 X9.35 X9.36 X9.37 X9.38 X9.39 X9.40 X10.1 X10.2 X10.3 X10.4 X12.4 | length 13.9
  Top Layer w0.15: U3.4 68.35,120.575 68.491,120.716 ; C5.1 68.45,115.075 67.075,116.45 65.982,116.45 65.85,116.582 65.85,117.868 65.982,118 66.657,118 67.557,118.9 68.093,118.9 68.95,119.757 U3.9 68.875,120.65 68.557,120.65 68.491,120.716 ; U3.11@69.025,121.5 U3.11 68.875,121.5 68.557,121.5 68.375,121.318 68.375,120.832 68.491,120.716
  other v1: 43.845,100.6 45.115,100.6 47.87,100.6 49.14,100.6 69.46,100.6 70.73,100.6 72,100.6 43.86,104.5 45.13,104.5 47.87,104.5 49.14,104.5 69.46,104.5 70.73,104.5 72,104.5 61,111.5 59.2,116.15 60.85,116.15 67.275,126.375 68.868,126.373 59.225,126.425 60.85,126.45 60.9,130.5 47.86,138.575 49.13,138.575 21,138.6 22.27,138.6 23.54,138.6 43.86,138.6 45.13,138.6 47.86,142.475 49.13,142.475 21,142.5 22.27,142.5 23.54,142.5 43.86,142.5 45.13,142.5
NetC5_2: C5.2 U3.10 | length 3.8
  Top Layer w0.15: C5.2@68.725,117.875 68.725,119.108 69.25,119.633 69.25,119.747 69.5,119.997 69.5,120.307 69.525,120.332 69.525,120.818 69.343,121 69.2,121 U3.10@69.125,121.075
NetC7_1: C7.1 U3.12 | length 9.3
  Top Layer w0.15: C7.1 66.95,116.85 69.543,116.85 69.8,117.107 69.8,120.183 69.825,120.208 69.825,121.987 69.737,122.075 U3.12
NetC7_2: C7.2 U3.8 | length 6.6
  Top Layer w0.15: C7.2 66.575,115.575 66,116.15 65.858,116.15 65.55,116.458 65.55,117.992 65.858,118.3 66.282,118.3 66.882,118.9 67.133,118.9 67.433,119.2 67.893,119.2 68.125,119.432 68.125,119.75 U3.8
NetC8_2: C8.2 U1.24 Z1.2 | length 9.5
  Top Layer w0.15: U1.24 43.97,113.765 43.97,113.092 44.839,112.224 45.151,112.224 45.95,111.425 Z1.2 45.6,109.65 45.6,107.082 45.468,106.95 44.95,106.95 44.825,106.825 C8.2
NetC9_2: C9.2 U1.23 Z1.1 | length 7.3
  Top Layer w0.15: C9.2 43.075,107.675 42.65,108.1 42.65,109.3 Z1.1 41.95,110.2 43.405,111.655 U1.23
NetC10_2: C10.2 R17.2 R18.1 U8.5 | length 18.5
  Top Layer w0.15: U8.5 58.131,106.695 59.127,105.7 66.675,105.7 66.975,106 66.975,106.65 C10.2 R18.1 64.625,106.725 64.484,106.866 64.484,107.309 64.343,107.45 62.6,107.45 61.875,106.725 R17.2
NetHL1_1: HL1.1 R24.2
  other v1: 71.8,125.5
NetHL2_1: HL2.1 R27.2
NetHL3_1: HL3.1 R30.2 | length 2.2
  Bottom Layer w0.15: HL3.1 39.9,124.625 R30.2
NetHL4_1: HL4.1 R31.2 | length 2.2
  Bottom Layer w0.15: HL4.1 R31.2
NetR1_1: R1.1 X1.A5 | length 1.9
  Top Layer w0.15: X1.A5 28.025,133.25 28.55,133.775 R1.1@28.55,133.825
NetR2_1: R2.1 X1.A6 | length 3.2
  Top Layer w0.15: v1(23.925,132.925) 24.6,132.25 X1.A6
NetR2_2: R2.2 R5.2 U1.104 | length 20.2
  Top Layer w0.15: v1(22.275,132.95) 22.275,133.747 22.275,133.81 22.363,133.897 22.599,134.057 ; U1.104 34.405,135.765 34.27,135.9 34.27,135.978 33.548,136.7 27.425,136.7 27.125,137 25.465,137 25.268,136.803 23.94,135.475 23.517,135.475 22.975,134.933 22.975,134.507 ; 22.599,134.057 ccw(c22.25,134.575) 22.717,134.16 ; 22.599,134.057 ccw(c22.25,134.575) 22.717,134.16 ; 22.717,134.16 22.937,134.407 ; 22.937,134.407 ccw(c22.825,134.507) 22.975,134.507 ; 22.937,134.407 ccw(c22.825,134.507) 22.975,134.507
  Bottom Layer w0.15: R5.2 22.225,130.425 22.084,130.566 21.591,130.566 21.45,130.707 21.45,132.2 22.175,132.925 R2.2
NetR3_1: R3.1 X1.A7 | length 3.1
  Top Layer w0.15: v1(23.925,131.3) 24.375,131.75 X1.A7
NetR3_2: R3.2 R4.2 U1.103 | length 19.4
  Top Layer w0.15: v1(22.25,134.575) 22.675,135 22.675,135.057 23.393,135.775 23.45,135.775 24.675,137 25.041,137 25.341,137.3 27.249,137.3 27.549,137 33.748,137 34.77,135.978 34.77,135.9 34.905,135.765 U1.103
  Bottom Layer w0.15: R3.2 22.225,132.025 22.378,132.178 22.847,132.178 23,132.332 23,133.8 22.25,134.55 R4.2 22.225,134.575 v1(22.25,134.575)
NetR4_1: R4.1 X1.B7 | length 3.7
  Top Layer w0.15: v1(23.9,134.55) 25.7,132.75 X1.B7
NetR5_1: R5.1 X1.B6 | length 3.6
  Top Layer w0.15: v1(23.9,129.675) 25.475,131.25 X1.B6
NetR6_1: R6.1 X1.B5 | length 1.8
  Top Layer w0.15: X1.B5 26.95,130.175 28.2,130.175 R6.1@28.525,129.85
NetR7_1: R7.1 R9.2 U1.132 X6.24 X10.24
  other v1: 61.83,142.475
NetR7_2: R7.2 X3.36 X7.36
  other v1: 42.59,104.5
NetR8_1: R8.1 X3.34 X7.34
  other v1: 41.32,104.5
NetR8_2: R8.2 R10.2 U1.124 X6.22 X10.22
  other v1: 60.56,142.475
NetR9_1: R9.1 X3.32 X7.32
  other v1: 40.05,104.5
NetR10_1: R10.1 X3.30 X7.30
  other v1: 38.78,104.5
NetR11_2: R11.2 U1.98 X2.7 | length 39.1
  Top Layer w0.15: v1(37.1,136.7) 37.1,136.524 37.405,136.219 U1.98
  Bottom Layer w0.15: X2.7 31.94,112.525 23.855,120.61 23.507,120.61 23.375,120.742 23.375,122.317 24.5,123.443 24.5,125.018 24.359,125.159 23.916,125.159 23.775,125.3 R11.2 23.775,126.125 24.833,127.183 24.833,128.408 25.28,128.855 25.28,129.327 25.588,129.635 26.06,129.635 31.175,134.75 31.443,134.75 31.618,134.925 31.876,134.925 33.683,136.731 33.807,136.731 35.388,136.7 ccw(c35.4,137.325) 35.4,136.7 v1(37.1,136.7)
NetR12_2: R12.2 U1.100 X2.8 | length 40.7
  Top Layer w0.15: v1(35.4,137.325) 36.405,136.32 U1.100
  Bottom Layer w0.15: X2.8 31.94,111.425 23.05,120.315 23.05,125.175 22.15,126.075 R12.2 22.15,126.175 24.045,128.07 24.081,128.106 24.98,129.452 25.463,129.935 28.382,132.441 cw(c28.825,132) 28.385,132.444 29.937,133.985 30.025,134.072 30.025,136.213 30.025,136.275 30.113,136.363 33.602,137.075 v1(35.4,137.325)
NetR13_2: R13.2 U1.112 X2.2 | length 20.3
  Top Layer w0.15: v1(29.175,131.45) 29.263,131.45 29.563,131.75 U1.112
  Bottom Layer w0.15: v1(29.175,131.45) 29.35,131.275 29.35,129.35 27.496,127.495 cw(c26.845,127.675) 27.202,127.102 27.034,126.998 27.001,126.998 26.223,126.998 25.4,126.175 R13.2 25.4,125.35 25.541,125.209 25.984,125.209 26.195,124.998 26.195,123.861 31.607,118.45 32.15,118.45 X2.2
NetR14_1: R14.1 U1.101 X2.1 | length 23.3
  Bottom Layer w0.15: X2.1 32.325,119.75 30.282,121.793 29.814,121.793 27.77,123.836 27.77,125.023 27.559,125.234 27.166,125.234 27,125.4 R14.1 27,126.175 31.95,131.125 31.95,132.537 32.038,132.625 33.068,132.625 33.2,132.757 33.2,133.793 33.482,134.075 34.768,134.075 34.868,133.975 35.462,133.975 ; 35.463,133.974 v1@35.972,133.974
  other v1: 35.875,133.85
NetR15_2: R15.2 U1.11 U3.16 X5.11 X9.11 | length 3.2
  Top Layer w0.15: U1.11 37.405,112.627 38.05,111.982 R15.2
  other v1: 54.22,100.6
NetR16_2: R16.2 U1.10 U3.1 X5.9 X9.9 | length 3.2
  Top Layer w0.15: R16.2 36.425,110.925 36.905,111.405 U1.10
  other v1: 52.95,100.6
NetR17_1: R17.1 U8.7 X4.24 X8.24 | length 5.5
  Top Layer w0.15: U8.7 56.44,109.235 56.66,109.015 56.66,108.668 57.403,107.925 58.875,107.925 60.075,106.725 R17.1
  other v1: 34.97,142.5
NetR18_2: R18.2 U8.6 X4.26 X8.26 | length 9
  Top Layer w0.15: U8.6 56.939,107.965 57.279,107.625 57.626,107.625 59.251,106 62.925,106 63.65,106.725 R18.2
  other v1: 36.24,142.5
NetR19_2: R19.2 U1.31 X5.32 X9.32 | length 3.5
  Top Layer w0.15: U1.31 47.405,114.425 47.54,114.56 47.54,114.638 48.053,115.151 48.326,115.151 v1(48.45,115.275)
  Bottom Layer w0.15: R19.2 v1(48.45,115.275)
  other v1: 66.92,104.5
NetR24_1: R24.1 U1.56
NetR25_1: R25.1 R28.2 SB1.1 U1.138 | length 20.1
  Top Layer w0.15: R28.2 R25.1 55.925,131.2 56.35,131.625 56.35,131.675 57.27,132.595 57.27,133.08 57.715,133.525 69.525,133.525 70.875,134.875 70.875,135.575 SB1.1
NetR26_1: R26.1 R29.2 SB1.2 | length 34.7
  Top Layer w0.15: R29.2 55.825,127.975 55.1,128.7 55.1,131.793 55.278,131.972 55.697,131.972 55.875,132.15 R26.1 55.975,132.975 55.975,135.143 57.007,136.175 68.443,136.175 69.743,137.475 72.393,137.475 72.525,137.343 72.525,129.975 71.55,129 SB1.2
NetR27_1: R27.1 U1.57
NetR32_1: R32.1 R34.2 SB2.1 U1.25 | length 28
  Top Layer w0.15: R32.1 R34.2 55.925,115.275 56.35,114.85 56.35,114.543 57.268,113.625 57.268,108.909 57.652,108.525 70.364,108.525 70.825,108.986 70.825,113.575 SB2.1
NetR33_1: R33.1 R35.2 SB2.2 | length 26.5
  Top Layer w0.15: R33.1 55.85,118.475 55.1,117.725 55.1,114.682 55.241,114.541 55.709,114.541 55.85,114.4 R35.2 55.85,112.003 56.96,110.893 56.96,109.217 56.968,109.209 56.968,108.785 57.528,108.225 68.618,108.225 70.093,106.75 SB2.2
NetR43_1: R43.1 R48.1 U1.50 | length 4.9
  Top Layer w0.15: U1.50 54.15,122.25 v1(54.2,122.2)
  Bottom Layer w0.15: v1(63.025,126.075) 63.025,125.9 64.65,124.275 R43.1
NetR44_1: R44.1 R49.1 U1.49 | length 3
  Top Layer w0.15: U1.49 51.89,121.685 52.563,121.685 53.041,121.206 53.041,121.009 53.45,120.6 v1(54.2,120.6)
NetR45_1: R45.1 R50.1 U1.22 | length 6.7
  Top Layer w0.15: R50.1 39.7,110.95 40.125,111.375 40.807,111.375 41.63,112.199 41.946,112.199 42.84,113.092 42.84,113.765 U1.22 ; R45.1 64.85,124.4 v1(64.85,126.05)
NetR46_1: R46.1 R47.1 U1.53 | length 2.4
  Top Layer w0.15: U1.53 54.125,123.75 v1(54.175,123.8)
NetR51_1: R51.1 VT1.2 | length 16.8
  Top Layer w0.15: VT1.2 57.625,136.925 v1(58.775,136.925) ; v1(65.75,131.3) 66.375,131.3 67.1,130.575 R51.1
  Layer 2 w0.15: v1(58.775,136.925) 59.4,136.3 66.009,136.3 67.55,134.759 67.55,133.1 v1(65.75,131.3)
NetR52_1: R52.1 VT2.2 | length 48
  Top Layer w0.15: v1(65.75,111.95) 66.163,111.537 67.063,111.537 R52.1
  Layer 2 w0.15: v1(61.05,136.95) 63.541,136.95 64.416,137.825 68.233,137.825 72.9,133.158 72.9,111.076 71.799,109.975 65.491,109.975 65.125,110.341 65.125,111.325 v1(65.75,111.95)
NetR53_1: R53.1 VT3.2 | length 41
  Layer 2 w0.15: v1(64.425,136.95) 66.067,136.95 66.642,137.525 68.109,137.525 72.6,133.034 72.6,111.2 72,110.6 v1(65.75,110.6)
  Bottom Layer w0.15: v1(65.75,110.6) 66.375,110.6 67.1,111.325 R53.1
NetR54_1: R54.1 VT4.2 | length 9.6
  Layer 2 w0.15: v1(65.75,129.825) 67.85,131.925 v1(67.85,136.9)
  Bottom Layer w0.15: v1(65.75,129.825) 66.425,129.825 R54.1
NetU1_1: U1.1 X5.10 X9.10
  other v1: 52.95,104.5
NetU1_2: U1.2 X5.12 X9.12
  other v1: 54.22,104.5
NetU1_3: U1.3 X5.14 X9.14
  other v1: 55.49,104.5
NetU1_4: U1.4 X6.5 X10.5
  other v1: 50.4,138.575
NetU1_5: U1.5 X6.7 X10.7
  other v1: 51.67,138.575
NetU1_12: U1.12 X3.24 X7.24
  other v1: 34.955,104.5
NetU1_13: U1.13 X5.24 X9.24
  other v1: 61.84,104.5
NetU1_14: U1.14 X5.26 X9.26
  other v1: 63.11,104.5
NetU1_15: U1.15 X6.15 X10.15
  other v1: 56.75,138.575
NetU1_18: U1.18 X6.17 X10.17
  other v1: 58.02,138.575
NetU1_19: U1.19 X4.25 X8.25
  other v1: 36.24,138.6
NetU1_20: U1.20 X4.27 X8.27
  other v1: 37.51,138.6
NetU1_21: U1.21 X4.29 X8.29
  other v1: 38.78,138.6
NetU1_27: U1.27 X3.20 X7.20
  other v1: 32.415,104.5
NetU1_28: U1.28 X3.18 X7.18
  other v1: 31.145,104.5
NetU1_29: U1.29 X5.28 X9.28
  other v1: 64.38,104.5
NetU1_34: U1.34 X5.23 X9.23
  other v1: 61.84,100.6
NetU1_35: U1.35 X4.15 X8.15
  other v1: 29.89,138.6
NetU1_36: U1.36 X3.19 X7.19
  other v1: 32.415,100.6
NetU1_37: U1.37 X3.17 X7.17
  other v1: 31.145,100.6
NetU1_40: U1.40 U1.127 U2.14
NetU1_41: U1.41 U2.8 U4.13 U5.A3 U6.2 U7.13 X3.29 X7.29
  other v1: 38.765,100.6
NetU1_42: U1.42 X2.3
NetU1_43: U1.43 X4.17 X8.17
  other v1: 31.16,138.6
NetU1_44: U1.44 X5.30 X9.30
  other v1: 65.65,104.5
NetU1_46: U1.46 X4.19 X8.19
  other v1: 32.43,138.6
NetU1_47: U1.47 X4.21 X8.21
  other v1: 33.7,138.6
NetU1_48: U1.48 X2.5
NetU1_58: U1.58 X6.9 X10.9
  other v1: 52.94,138.575
NetU1_59: U1.59 X6.11 X10.11
  other v1: 54.21,138.575
NetU1_60: U1.60 X4.7 X8.7
  other v1: 24.81,138.6
NetU1_64: U1.64 X4.9 X8.9
  other v1: 26.08,138.6
NetU1_66: U1.66 X4.11 X8.11
  other v1: 27.35,138.6
NetU1_67: U1.67 X4.13 X8.13
  other v1: 28.62,138.6
NetU1_69: U1.69 X3.22 X7.22
  other v1: 33.685,104.5
NetU1_70: U1.70 X6.10 X10.10
  other v1: 52.94,142.475
NetU1_73: U1.73 U8.4
NetU1_74: U1.74 U8.1
NetU1_75: U1.75 X6.16 X10.16 | length 13.1
  Top Layer w0.15: U1.75 48.905,137.222 49.755,138.072 49.755,139.467 49.938,139.65 53.783,139.65 55.508,141.375 56.01,141.375 56.75,142.115 v1(56.75,142.475)
NetU1_77: U1.77 X6.12 X10.12 | length 18
  Top Layer w0.15: U1.77 47.905,137.134 47.235,137.804 47.235,139.108 48.274,140.148 53.856,140.148 55.384,141.675 55.808,141.675 56.105,141.972 56.105,142.855 56.138,142.888 56.138,142.995 55.808,143.325 55.172,143.325 54.872,143.025 54.37,143.025 54.21,142.865 v1(54.21,142.475)
NetU1_80: U1.80 X6.14 X10.14 | length 14.6
  Top Layer w0.15: U1.80 46.405,135.765 46.54,135.9 46.54,139.19 47.798,140.448 53.311,140.448 54.835,141.972 54.835,142.27 55.04,142.475 v1(55.48,142.475)
NetU1_85: U1.85 U9.5
NetU1_86: U1.86 U9.2
NetU1_87: U1.87 VT1.3 | length 18.2
  Top Layer w0.15: U1.87 42.97,135.83 43.04,135.978 43.192,136.13 43.925,136.82 44.001,136.897 44.001,137.254 v1(44.125,137.378)
  Layer 1 w0.15: v1(44.125,137.378) 44.737,137 56.025,137 v1(58.5,134.525)
NetU1_88: U1.88 VT2.3 | length 23
  Top Layer w0.15: U1.88 42.405,136.343 42.624,136.561 42.624,136.673 42.975,137.024 v1(42.975,137.45)
  Layer 1 w0.15: v1(42.975,137.45) 43.82,137.924 cw(c44.125,137.378) 44.146,138.003 55.824,137.625 55.867,137.582 57.149,136.3 59.284,136.3 61.134,134.45 v1(61.975,134.45)
NetU1_89: U1.89 VT3.3 | length 27
  Top Layer w0.15: U1.89 41.84,135.83 41.84,136.223 41.942,136.325 41.942,137.092 v1(42,137.15)
  Layer 1 w0.15: v1(42,137.15) 42.754,136.865 ccw(c42.975,137.45) 42.975,136.825 43.835,136.825 ccw(c44.125,137.378) 44.045,136.759 44.499,136.7 55.441,136.7 55.566,136.575 58.316,133.825 64.65,133.825 v1(65.35,134.525)
NetU1_90: U1.90 VT4.3 | length 31.4
  Top Layer w0.15: v1(41.05,136.95) 41.05,136.198 41.27,135.978 41.34,135.83 U1.90
  Layer 1 w0.15: v1(41.05,136.95) 41.475,136.525 43.768,136.525 ccw(c44.125,137.378) 43.976,136.466 44.375,136.4 55.317,136.4 58.192,133.525 67.775,133.525 v1(68.775,134.525)
NetU1_93: U1.93 U7.12
NetU1_109: U1.109 X12.2
NetU1_110: U1.110 X12.3
NetU1_111: U1.111 X5.25 X9.25
  other v1: 63.11,100.6
NetU1_113: U1.113 X4.30 X8.30
  other v1: 38.78,142.5
NetU1_114: U1.114 U9.3 | length 14.9
  Top Layer w0.15: U9.3 25.75,122.863 28.806,125.918 28.806,127.563 29.1,127.857 29.1,129.962 29.25,130.112 29.25,130.188 29.747,130.685 30.42,130.685 U1.114
NetU1_115: U1.115 U9.7 | length 24.5
  Top Layer w0.15: U9.7 24.48,119.417 25.005,118.892 25.005,117.695 25.25,117.45 25.25,117.433 25.533,117.15 25.967,117.15 26.495,117.678 26.495,123.183 29.106,125.794 29.106,125.968 29.4,126.262 29.4,129.838 29.677,130.115 29.755,130.115 29.89,130.25 U1.115
NetU1_116: U1.116 X4.28 X8.28
  other v1: 37.51,142.5
NetU1_117: U1.117 U9.6
NetU1_123: U1.123 U9.1 | length 16
  Top Layer w0.15: U9.1 23.21,117.885 23.418,117.678 23.735,117.678 24.263,117.15 25.108,117.15 25.408,116.85 26.092,116.85 26.392,117.15 27.725,117.15 28,117.425 28,124.264 29.406,125.67 29.406,125.844 29.677,126.115 29.755,126.115 29.89,126.25 U1.123
NetU1_125: U1.125 U6.6
NetU1_126: U1.126 U2.5
NetU1_128: U1.128 U4.12
NetU1_129: U1.129 U5.A5
NetU1_134: U1.134 U2.10 U2.15 U4.1 U5.C1 U6.5 U7.1 X3.25 X7.25
  other v1: 36.225,100.6
NetU1_135: U1.135 U2.9 U4.14 U5.B4 U6.4 U7.14 X3.27 X7.27
  other v1: 37.495,100.6
NetU1_136: U1.136 X5.29 X9.29
  other v1: 65.65,100.6
NetU1_137: U1.137 X5.27 X9.27
  other v1: 64.38,100.6
NetU1_139: U1.139 X4.23 X8.23
  other v1: 34.97,138.6
NetU1_140: U1.140 X4.31 X8.31
  other v1: 40.05,138.6
NetU1_141: U1.141 X5.6 X9.6
  other v1: 50.41,104.5
NetU1_142: U1.142 X5.8 X9.8
  other v1: 51.68,104.5
NetX3_15: X3.15 X7.15
  other v1: 29.875,100.6
NetX3_16: X3.16 X7.16
  other v1: 29.875,104.5
NetX3_21: X3.21 X7.21
  other v1: 33.685,100.6
NetX3_23: X3.23 X7.23
  other v1: 34.955,100.6
NetX3_26: X3.26 X7.26
  other v1: 36.225,104.5
NetX3_28: X3.28 X7.28
  other v1: 37.495,104.5
NetX3_31: X3.31 X7.31
  other v1: 40.035,100.6
NetX3_33: X3.33 X7.33
  other v1: 41.305,100.6
NetX3_35: X3.35 X7.35
  other v1: 42.575,100.6
NetX4_8: X4.8 X8.8
  other v1: 24.81,142.5
NetX4_10: X4.10 X8.10
  other v1: 26.08,142.5
NetX4_12: X4.12 X8.12
  other v1: 27.35,142.5
NetX4_14: X4.14 X8.14
  other v1: 28.62,142.5
NetX4_16: X4.16 X8.16
  other v1: 29.89,142.5
NetX4_18: X4.18 X8.18
  other v1: 31.16,142.5
NetX4_20: X4.20 X8.20
  other v1: 32.43,142.5
NetX4_22: X4.22 X8.22
  other v1: 33.7,142.5
NetX4_32: X4.32 X8.32
  other v1: 40.05,142.5
NetX4_33: X4.33 X8.33
  other v1: 41.32,138.6
NetX4_34: X4.34 X8.34
  other v1: 41.32,142.5
NetX4_35: X4.35 X8.35
  other v1: 42.59,138.6
NetX4_36: X4.36 X8.36
  other v1: 42.59,142.5
NetX5_5: X5.5 X9.5
  other v1: 50.41,100.6
NetX5_7: X5.7 X9.7
  other v1: 51.68,100.6
NetX5_13: X5.13 X9.13
  other v1: 55.49,100.6
NetX5_15: X5.15 X9.15
  other v1: 56.76,100.6
NetX5_16: X5.16 X9.16
  other v1: 56.76,104.5
NetX5_17: X5.17 X9.17
  other v1: 58.03,100.6
NetX5_18: X5.18 X9.18
  other v1: 58.03,104.5
NetX5_19: X5.19 X9.19
  other v1: 59.3,100.6
NetX5_20: X5.20 X9.20
  other v1: 59.3,104.5
NetX5_21: X5.21 X9.21
  other v1: 60.57,100.6
NetX5_22: X5.22 X9.22
  other v1: 60.57,104.5
NetX5_31: X5.31 X9.31
  other v1: 66.92,100.6
NetX5_33: X5.33 X9.33
  other v1: 68.19,100.6
NetX5_34: X5.34 X9.34
  other v1: 68.19,104.5
NetX6_6: X6.6 X10.6
  other v1: 50.4,142.475
NetX6_8: X6.8 X10.8
  other v1: 51.67,142.475
NetX6_13: X6.13 X10.13
  other v1: 55.48,138.575
NetX6_18: X6.18 X10.18
  other v1: 58.02,142.475
NetX6_19: X6.19 X10.19
  other v1: 59.29,138.575
NetX6_20: X6.20 X10.20
  other v1: 59.29,142.475
NetX6_21: X6.21 X10.21
  other v1: 60.56,138.575
NetX6_23: X6.23 X10.23
  other v1: 61.83,138.575
NetX6_25: X6.25 X10.25
  other v1: 63.1,138.575
NetX6_26: X6.26 X10.26
  other v1: 63.1,142.475
VBUS: HL5.1 X1.A4_B9 X1.B4_A9 | length 17.4
  Top Layer w0.15: v1(25.571,134.073) 25.6,134.102 v1@25.6,134.175 ; X1.B4_A9 26.057,129.6 26.022,129.635 25.124,129.635 24.539,129.05 23.641,129.05 23.275,129.416 23.275,134.809 23.641,135.175 24.606,135.175 25.6,134.181 v1@25.6,134.175 ; X1.A4_B9 26.84,134.365 26.039,134.365 25.849,134.175 v1@25.6,134.175
  Bottom Layer w0.15: v1(25.571,134.073) 27.148,134.073 HL5.1
VCC: VT1.1 VT2.1 VT3.1 VT4.1 X3.1 X3.2 X3.3 X3.4 X3.5 X3.6 X6.35 X6.36 X6.37 X6.38 X6.39 X6.40 X7.1 X7.2 X7.3 X7.4 X7.5 X7.6 X10.35 X10.36 X10.37 X10.38 X10.39 X10.40 | length 10
  Top Layer w0.15: v1(23.525,100.6) X3.3 v1(22.255,100.6) X3.1 v1(20.985,100.6) v1(20.985,104.5) X3.2 v1(22.255,104.5) X3.4 v1(23.525,104.5) ; VT1.1 56.932,134.318 v1(56.932,133.625)
  other v1: 66.925,134.5 60.175,134.525 63.525,134.55 69.45,138.575 70.72,138.575 71.99,138.575 69.45,142.475 70.72,142.475 71.99,142.475
pads on no net: U1.7 U1.8 U1.9 U1.26 U1.45 U1.54 U1.55 U1.63 U1.65 U1.68 U1.71 U1.76 U1.78 U1.79 U1.81 U1.82 U1.91 U1.92 U1.96 U1.97 U1.99 U1.102 U1.105 U1.106 U1.118 U1.119 U1.122 U1.133 U1.143 U2.1 U2.12 U2.13 U2.16 U3.3 U3.5 U3.6 U3.7 U3.14 U3.15 U4.2 U4.3 U4.4 U4.9 U4.10 U4.11 U5.D2 U5.D4 U6.7 U7.2 U7.3 U7.4 U7.9 U7.10 U7.11 X1. X1.A8 X1.B8 X1.S1 X1.S2 X1.S3 X1.S4 X2.9 X2.CD X2.S3 X2.S4 X12.S

## Keep-outs
Keep-Out Layer:
  circle w0.25: c5,95 r4.5
  circle w0.25: c155,95 r4.5
  circle w0.25: c155,5 r4.5
  circle w0.25: c5,5 r4.5
  lines w0.254: 2.5,10 2.5,90 10,90 10,97.5 150,97.5 150,90 157.5,90 157.5,10 150,10 150,2.5 10,2.5 10,10 2.5,10

## Silkscreen, mask and mechanical layers (free items; w line width, h text height)
Board Outline:
  lines w0.25: 0,0 160,0 160,100 0,100 0,0

## Dimensions
155,95 to 171.075,107.95 on Board Dimensions
160,100 to 160,0 on Board Dimensions
0,100 to 160,100 on Board Dimensions

## Text inside footprints (layer, text, board x,y; h text height)
X1: Top Assembly "PCB EDGE" at 20.225,126.8 h0.61 r270